# EAGLE board LPFlasher-v1.0 (EAGLE 7.6.0)
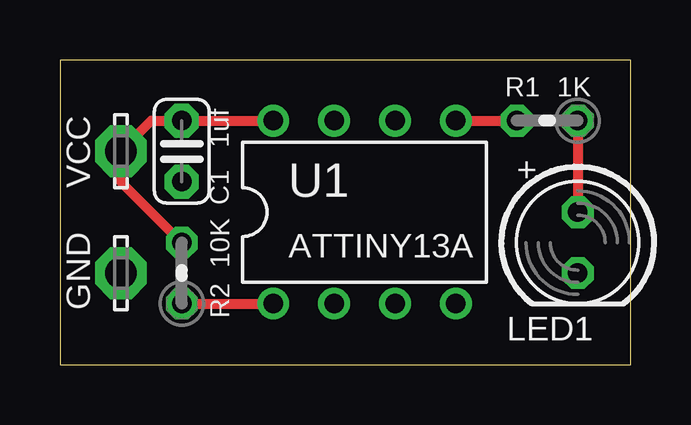
[diagram p0: board, top side]
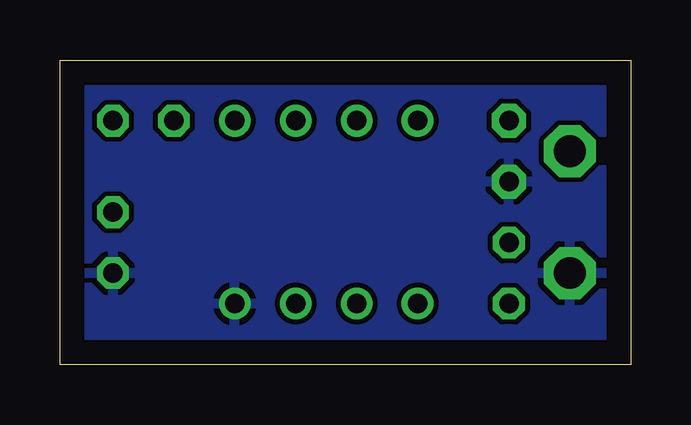
[diagram p1: board, bottom side, seen from below]

Size 23.8 x 12.69 mm. Coordinates in mm from the lower left corner, seen from the top.
Outline: 0,0 23.8,0 23.8,12.69 0,12.69 0,0
Copper layers (1*16): Top 0.035mm / dielectric 1.5mm / Bottom 0.035mm
Design rules "default": minimum track width 10mil, minimum drill 0.6mm, track to track 8mil, track to pad 8mil, pad to pad 8mil, via to via 8mil, smd to smd 8mil, copper to edge 40mil, drill to drill 8mil, minimum pad ring 10mil, minimum via ring 8mil, stop-mask expansion 4mil, vias tented up to drill 0mil, thermal gap 10mil

## Footprints (pad centres in the part's own frame; a part is rotated, then mirrored left to right if it is on the bottom)
C025-024X044 = drill 0.813 pad 1.422 octagon: 1 -1.27,0; 2 1.27,0
LSP13 = drill 1.321 pad 2.159 octagon: MP 0,0
LED5MM = drill 0.813 octagon: A -1.27,0; K 1.27,0
0204V = drill 0.813 octagon: 1 -1.27,0; 2 1.27,0
PDIP08_300MIL = drill 0.813: 1 -3.81,-3.81; 2 -1.27,-3.81; 3 1.27,-3.81; 4 3.81,-3.81; 5 3.81,3.81; 6 1.27,3.81; 7 -1.27,3.81; 8 -3.81,3.81

## Placement (x,y rotation side)
C1  1uf  [C025-024X044]  5.08,8.89 270 top
GND  LSP13  [LSP13]  2.54,3.81 90 top
LED1  [LED5MM]  21.59,5.08 270 top
R1  1K  [0204V]  20.32,10.16 180 top
R2  10K  [0204V]  5.08,3.81 90 top
U1  ATTINY13A  [PDIP08_300MIL]  12.7,6.35 0 top
VCC  LSP13  [LSP13]  2.54,8.89 90 top

## Library data of the parts
C1 = adafruit
GND VCC = solpad
LED1 = led
R1 R2 = resistor
U1 = _hhn_attiny25_45_85

## Nets
GND: C1.2 GND.MP LED1.K U1.4
N$1: R1.2 U1.5
N$2: LED1.A R1.1
N$3: R2.1 U1.1
VCC: C1.1 R2.2 U1.8 VCC.MP

## Tracks (layer width: path | path; a pad name or v marks a point on that pad's centre or on a via)
GND
  pour Bottom: 0,0 24.13,0 24.13,12.7 0,12.7
N$1
  Top 0.406: U1.5 R1.2
N$2
  Top 0.406: R1.1 LED1.A
N$3
  Top 0.406: R2.1 U1.1
VCC
  Top 0.406: U1.8 C1.1 3.81,10.16 VCC.MP 2.54,7.62 R2.2

## Text on the board
tPlace: +